# EAGLE board PV_power_board_0.2 (EAGLE 9.6.2)

Size 160 x 100 mm. Coordinates in mm from the lower left corner, seen from the top.
Outline: 0,0 160,0 160,100 0,100 0,0
Copper layers (1*16): Top 0.035mm / dielectric 1.5mm / Bottom 0.035mm
Design rules "default": minimum track width 6mil, minimum drill 0.35mm, track to track 6mil, track to pad 6mil, pad to pad 6mil, via to via 6mil, smd to smd 6mil, copper to edge 40mil, drill to drill 6mil, minimum pad ring 10mil, minimum via ring 8mil, stop-mask expansion 4mil, vias tented up to drill 0mil, thermal gap 10mil

## Footprints (pad centres in the part's own frame; a part is rotated, then mirrored left to right if it is on the bottom)
E3,5-8 = drill 0.813 pad 1.6: + -1.778,0 | drill 0.813 pad 1.6 octagon: - 1.778,0
C025-025X050 = drill 0.813 octagon: 1 -1.27,0; 2 1.27,0
C2.5-2 = drill 0.813 pad 1.6 octagon: 1 -1.27,0; 2 1.27,0
C4111-15 = drill 1.499 long: A 7.62,0; C -7.62,0
TO220-5 = drill 0.9 long: 1 -3.4,-8.4; 2 -1.7,-4.5; 3 0,-8.4; 4 1.7,-4.5; 5 3.4,-8.4
SOT23-5 = smd 0.6 x 1.2: 1 -0.95,-1.306; 2 0,-1.306; 3 0.95,-1.306; 4 0.95,1.306; 5 -0.95,1.306
TO220V = drill 1.016 long: 1 -2.54,-2.54; 2 0,-2.54; 3 2.54,-2.54
JP1 = drill 0.914 long: 1 0,-1.27; 2 0,1.27
JP4 = drill 0.914 long: 1 -3.81,0; 2 -1.27,0; 3 1.27,0; 4 3.81,0
6000-XXXX-RC = drill 0.9 pad 1.422: 1 -2.5,0; 2 2.5,0
LED5MM = drill 0.813 octagon: A -1.27,0; K 1.27,0
0207/10 = drill 0.813 octagon: 1 -5.08,0; 2 5.08,0
B3F-10XX = drill 1.016 long: 1 -3.251,2.261; 2 3.251,2.261; 3 -3.251,-2.261; 4 3.251,-2.261
F/CM12P = drill 1.016 pad 2.54 octagon: + 3.81,0; - -3.81,0
03P = drill 0.914 long: 1 -2.54,0; 2 0,0; 3 2.54,0
DIP28 = drill 0.813 pad 1.626: 1 -16.51,-3.81; 2 -13.97,-3.81; 3 -11.43,-3.81; 4 -8.89,-3.81; 5 -6.35,-3.81; 6 -3.81,-3.81; 7 -1.27,-3.81; 8 1.27,-3.81; 9 3.81,-3.81; 10 6.35,-3.81; 11 8.89,-3.81; 12 11.43,-3.81; 13 13.97,-3.81; 14 16.51,-3.81; 15 16.51,3.81; 16 13.97,3.81; 17 11.43,3.81; 18 8.89,3.81; 19 6.35,3.81; 20 3.81,3.81; 21 1.27,3.81; 22 -1.27,3.81; 23 -3.81,3.81; 24 -6.35,3.81; 25 -8.89,3.81; 26 -11.43,3.81; 27 -13.97,3.81; 28 -16.51,3.81
MKS1855-6-0-505 = drill 1 pad 1.422: 1 -5,0; 2 -2.5,0; 3 0,0; 4 2.5,0; 5 5,0
MKS1856-6-0-606 = drill 1 pad 1.422: 1 -6.25,0; 2 -3.75,0; 3 -1.25,0; 4 1.25,0; 5 3.75,0; 6 6.25,0
HC49US = drill 0.7 pad 1.651: 1 -2.54,0; 2 2.54,0

## Placement (x,y rotation side)
C1  330µF  [E3,5-8]  40.64,54.61 0 top
C2  100µF  [E3,5-8]  29.21,54.61 0 top
C3  10µF  [C025-025X050]  48.26,71.12 0 top
C4  0.33µF  [C025-025X050]  72.39,71.12 0 top
C5  0.1µF  [C025-025X050]  66.04,71.12 0 top
C6  22p  [C2.5-2]  41.91,71.12 0 top
C7  22p  [C2.5-2]  36.83,71.12 0 top
C8  100n  [C2.5-2]  59.69,71.12 0 top
C9  100n  [C2.5-2]  53.34,71.12 0 top
D1  1N5908  [C4111-15]  67.31,62.23 0 top
D3  STPS2L60  [C4111-15]  46.99,62.23 0 top
IC1  LM2576T  [TO220-5]  44.45,21.59 0 top
IC2  LMV358  [SOT23-5]  20.32,52.07 0 top
IC3  7805TV  [TO220V]  31.75,48.26 0 top
JP1  [JP1]  63.5,78.74 0 top
JP2  [JP1]  57.15,78.74 0 top
JP3  [JP1]  50.8,78.74 0 top
JP4  [JP1]  44.45,78.74 0 top
JP5  [JP4]  19.05,63.5 0 top
L1  330µH  [6000-XXXX-RC]  57.15,19.05 0 top
LED1  [LED5MM]  25.4,71.12 0 top
LED2  [LED5MM]  68.58,78.74 0 top
R1  10k  [0207/10]  34.29,76.2 0 top
R2  33k  [0207/10]  21.59,76.2 0 top
R3  4.7k  [0207/10]  71.12,83.82 0 top
R4  1k  [0207/10]  58.42,83.82 0 top
R5  4.7  [0207/10]  45.72,83.82 0 top
R6  1k  [0207/10]  33.02,83.82 0 top
R7  120R  [0207/10]  20.32,83.82 0 top
R8  12k  [0207/10]  71.12,88.9 0 top
R9  1k  [0207/10]  58.42,88.9 0 top
R10  120R  [0207/10]  45.72,88.9 0 top
R11  220R  [0207/10]  33.02,88.9 0 top
R12  10k  [0207/10]  20.32,88.9 0 top
S1  [B3F-10XX]  52.07,53.34 0 top
SG1  [F/CM12P]  69.85,19.05 0 top
SL1  BATTERY  [03P]  71.12,54.61 0 top
SL2  PV_PANEL  [03P]  19.05,44.45 0 top
SL3  LOAD  [03P]  62.23,54.61 0 top
U1  328P  [DIP28]  57.15,44.45 0 top
X1  I_SENSOR  [MKS1855-6-0-505]  48.26,33.02 0 top
X2  BT_MODULE  [MKS1856-6-0-606]  67.31,33.02 0 top
X3  PROGRAM_PORT  [MKS1855-6-0-505]  25.4,16.51 0 top
Y1  16MHz  [HC49US]  30.48,63.5 0 top

## Library data of the parts
C1-C5 = rcl; SPICEPREFIX: C
C6-C9 = capacitor-wima
D1 D3 = diode
IC1 = LM2576_eagle_lib
IC2 IC3 = linear
JP1-JP5 = jumper
L1 = rcl; SPICEPREFIX: L
LED1 LED2 = led
R1-R12 = rcl; SPICEPREFIX: R
S1 = switch-omron; MPN: B3F-1000; OC_FARNELL: 176432; OC_NEWARK: 36M3542
SG1 = buzzer; OC_FARNELL: unknown; OC_NEWARK: unknown
SL1-SL3 = con-amp-quick; OC_FARNELL: unknown; OC_NEWARK: unknown
U1 = SparkFun-IC-Microcontroller; PROD_ID: IC-09136
X1 X3 = con-stocko; OC_FARNELL: 1134508; OC_NEWARK: unknown
X2 = con-stocko; OC_FARNELL: 1174959; OC_NEWARK: unknown
Y1 = SparkFun-Clocks; PROD_ID: XTAL-08181; SF_ID: COM-00536

## Nets
+5V: C5.1 C9.2 IC2.5 IC3.3 JP4.2 JP5.4 LED1.A R1.2 R12.1 U1.7 U1.20 X1.4 X3.5
BAT+: C1.+ C4.1 IC3.1 JP1.2 JP3.1 L1.1 R5.2 R8.1
BAT_VOLT: R5.1 R6.2 U1.25
DEV0: JP5.1 U1.27
DEV1: JP5.2 U1.26
FDBK: IC2.3 IC2.4 R9.1
GND: C1.- C2.- C3.2 C4.2 C5.2 C6.1 C7.1 C8.1 C9.1 D1.A IC1.3 IC2.2 IC3.2 JP2.2 JP5.3 LED2.K R4.1 R6.1 R7.2 S1.3 S1.4 SG1.- SL1.2 SL1.3 SL3.2 SL3.3 U1.8 U1.22 X1.3 X2.4 X3.4
LM_ENABLE: IC1.5 R1.1
LM_FEEDBACK: IC1.4 R8.2 R9.2
LM_VIN: C2.+ IC1.1 R3.2 X1.2
N$1: D1.C IC1.2 L1.2
N$2: C3.1 IC2.1 R2.1
N$3: D3.C X1.1
N$4: LED1.K R7.1
N$5: D3.A SL2.3
N$6: JP1.1 SL3.1
N$7: C6.2 U1.9 Y1.2
N$8: R11.2 U1.14
N$9: C7.2 U1.10 Y1.1
N$10: JP3.2 SL1.1
N$11: R10.2 U1.15
N$12: LED2.A R10.1
N$13: C8.2 U1.21
N$14: R11.1 SG1.+
N$15: U1.6 X2.2
N$16: U1.11 X2.3
N$17: JP2.1 SL2.1 SL2.2
N$18: JP4.1 X2.5
PV_CURRENT: U1.24 X1.5
PV_VOLT: R3.1 R4.2 U1.23
PWM: R2.2 U1.5
RESET: R12.2 S1.1 S1.2 U1.1 X3.1
RXD: U1.2 X3.3
TXD: U1.3 X3.2

## Tracks (layer width: path | path; a pad name or v marks a point on that pad's centre or on a via)
+5V  (12 unrouted)
BAT+  (7 unrouted)
BAT_VOLT  (2 unrouted)
DEV0  (1 unrouted)
DEV1  (1 unrouted)
FDBK  (2 unrouted)
GND  (30 unrouted)
LM_ENABLE  (1 unrouted)
LM_FEEDBACK  (2 unrouted)
LM_VIN  (3 unrouted)
N$1  (2 unrouted)
N$2  (2 unrouted)
N$3  (1 unrouted)
N$4  (1 unrouted)
N$5  (1 unrouted)
N$6  (1 unrouted)
N$7  (2 unrouted)
N$8  (1 unrouted)
N$9  (2 unrouted)
N$10  (1 unrouted)
N$11  (1 unrouted)
N$12  (1 unrouted)
N$13  (1 unrouted)
N$14  (1 unrouted)
N$15  (1 unrouted)
N$16  (1 unrouted)
N$17  (2 unrouted)
N$18  (1 unrouted)
PV_CURRENT  (1 unrouted)
PV_VOLT  (2 unrouted)
PWM  (1 unrouted)
RESET  (4 unrouted)
RXD  (1 unrouted)
TXD  (1 unrouted)